# Altium PCB BaseNode.PcbDoc (part 3 of 3)
Units mil, origin at the board's own origin, x right, y up, seen from the top; angles counter-clockwise.
Board outline 2200 x 2870 mil, 2 copper layers (Top Layer, Bottom Layer), stack 65.8 mil thick; 93 components, 79 nets, 344 pads, 79 vias.
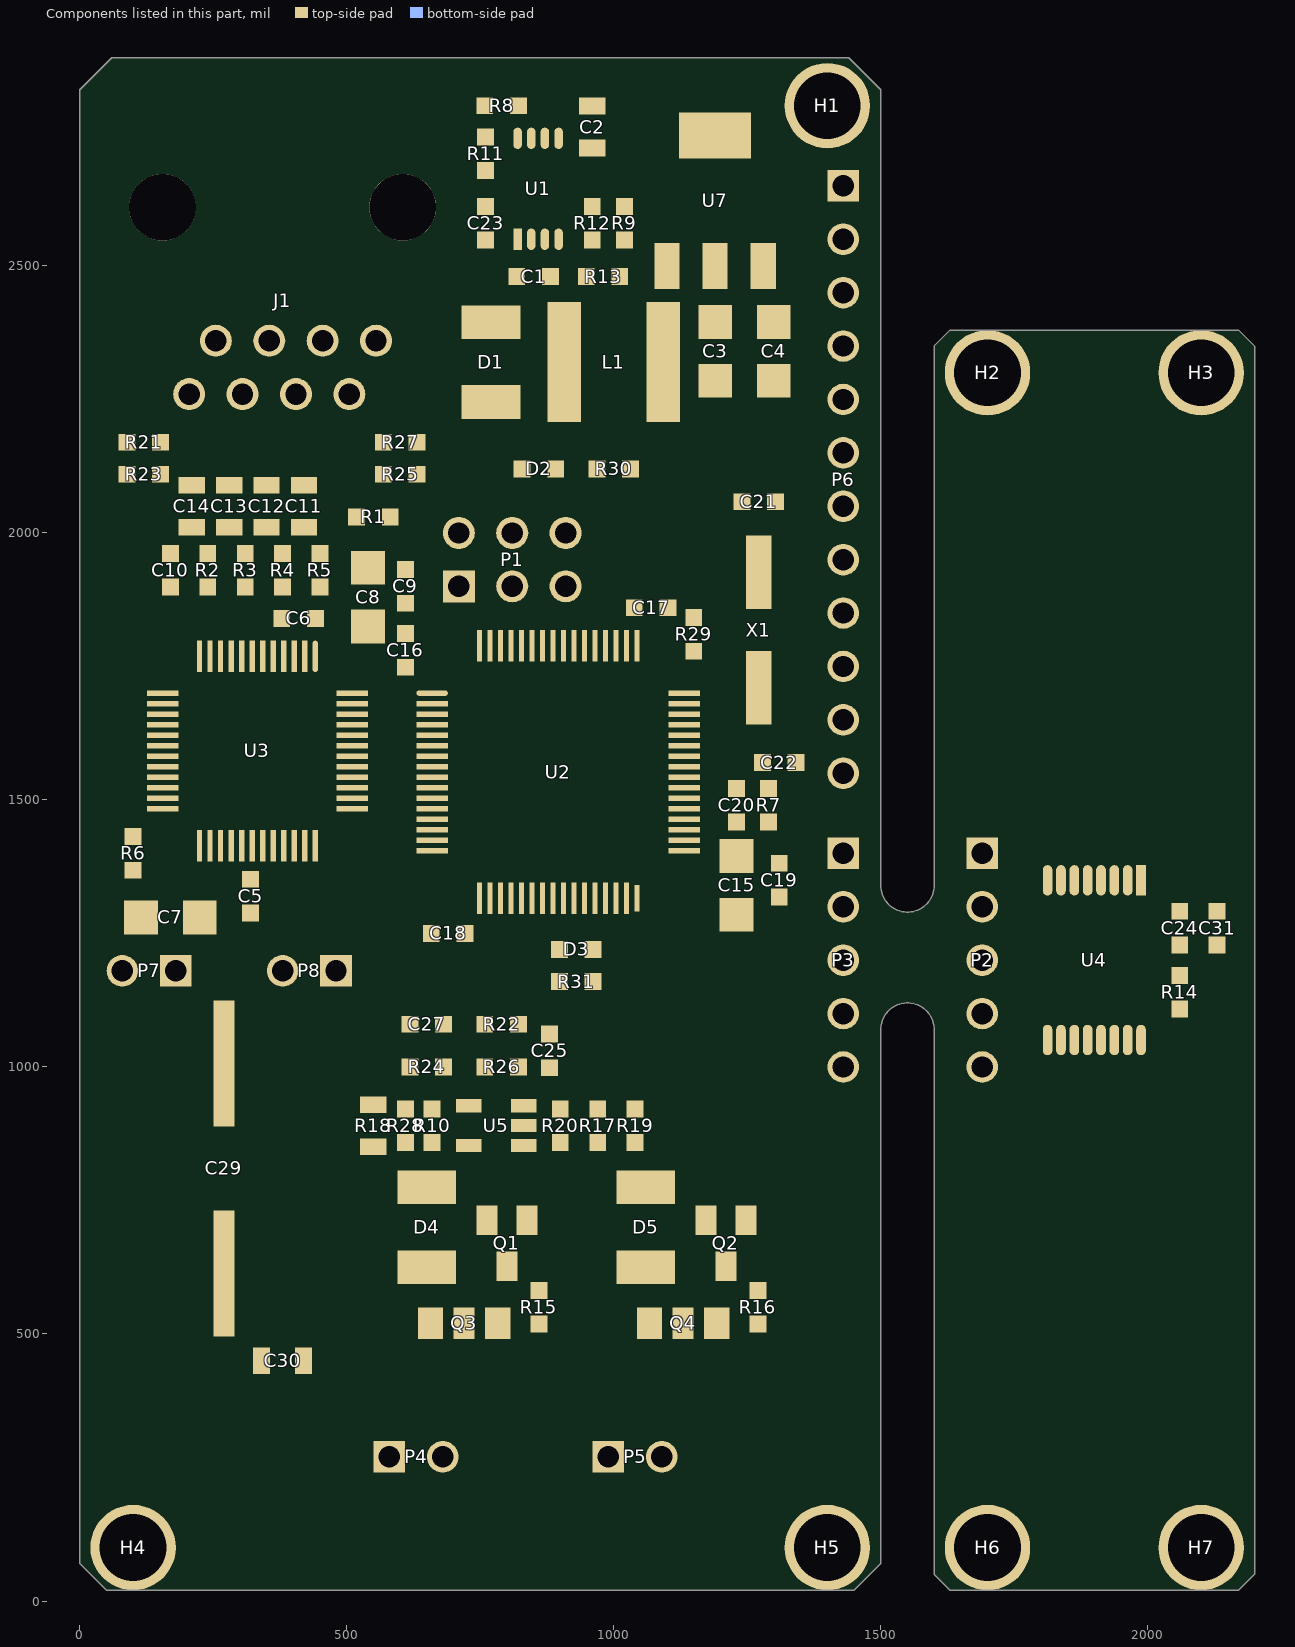
[diagram p3: the components of this part, seen from the top]

## Polygon pours and split planes (outlines as drawn) (continued)
GND on Bottom Layer "MAG_GND" (solid, pour order 11): 1600,1500 2200,1500 2200,900 1600,900
GND on Top Layer "TOP_GND" (solid, remove dead copper, pour order 9): 70,0 0,70 0,2830 70,2900 1430,2900 1500,2830 1500,70 1430,0
GND on Top Layer "MAG_GND" (solid, pour order 13): 1600,1500 2200,1500 2200,1320 1600,1320
COIL1+ on Top Layer "HEAT_SPREAD1" (solid, pour order 8): 940,480 940,300 1000,240 1020,240 1280,240 1300,260 1300,480
COIL0+ on Top Layer "HEAT_SPREAD0" (solid, pour order 6): 600,480 600,320 600,300 660,240 900,240 920,260 920,480

## Keep-outs
Keep-Out Layer:
  lines w10: 1480,2560 1500,2560
  lines w22: 0,70 0,2830 60,2890 1440,2890 1500,2830 1500,1290 1600,1290 1600,2350 1630,2380 2170,2380 2200,2350 2200,50 2170,20 1630,20 1600,50 1600,1120 1500,1120 1500,70 1450,20 50,20 0,70

## Silkscreen, mask and mechanical layers (free items; w line width, h text height)
Top Overlay:
  text "G" at 1340,1380 h40
  text "P" at 1340,1290 h40
  text "CS" at 1300,1180 h40
  text "+" at 280,1150 h60
  text "-" at 540,1150 h60
  text "CK" at 1300,1080 h40
  text "JMP" at 50,1060 h60
  text "VPWR" at 330,1060 h60
  text "D" at 1340,980 h40
  text "MAG" at 1390,920 h60 r270
  text "THIS SIDE" at 1640,800 h60
  text "TOWARD" at 1640,710 h60
  text "JHW Sept 2012" at 1300,700 h40 r270
  text "Controller,rC" at 1360,700 h40 r270
  text "Hexapod Joint" at 1430,690 h40 r270
  text "MAGNET" at 1640,620 h60
  text "COIL0" at 500,140 h60
  text "COIL1" at 920,140 h60
Top Solder:
  drawing of 815 lines, arcs and shapes, not listed
  text "projecthexapod.com" at 230,60 h60
Assembly Top:
  lines w7.87: 30,1130 230,1130 230,1230 30,1230 30,1130 ; 330,1130 330,1230 530,1230 530,1130 330,1130 ; 530,220 530,320 730,320 730,220 530,220 ; 940,220 940,320 1140,320 1140,220 940,220 ; 1380,950 1380,1450 1480,1450 1480,950 1380,950 ; 1380,1500 1380,2700 1480,2700 1480,1500 1380,1500 ; 1640,950 1640,1450 1740,1450 1740,950 1640,950
  text "AUX" at 1420,2140 h30 r270
  text "MAG" at 1420,1240 h30 r270
  text "MAG" at 1680,1230 h30 r270
  text "JUMP" at 72,1090 h30
  text "VALVEPWR" at 320,1090 h30
  text "COIL0" at 497,145 h60
  text "COIL1" at 919,143 h60
Board Outline:
  the board outline again, w10

## Text inside footprints (layer, text, board x,y; h text height)
J1: Top Overlay "1" at 620,2390 h60 r180; Top Overlay "8" at 160,2290 h60 r180